# Altium PCB PCB1.PcbDoc
Units mm, origin at the board's own origin, x right, y up, seen from the top; angles counter-clockwise.
Board outline 100 x 50 mm, 2 copper layers (Top Layer, Bottom Layer); 21 components, 15 nets, 63 pads, 0 vias.
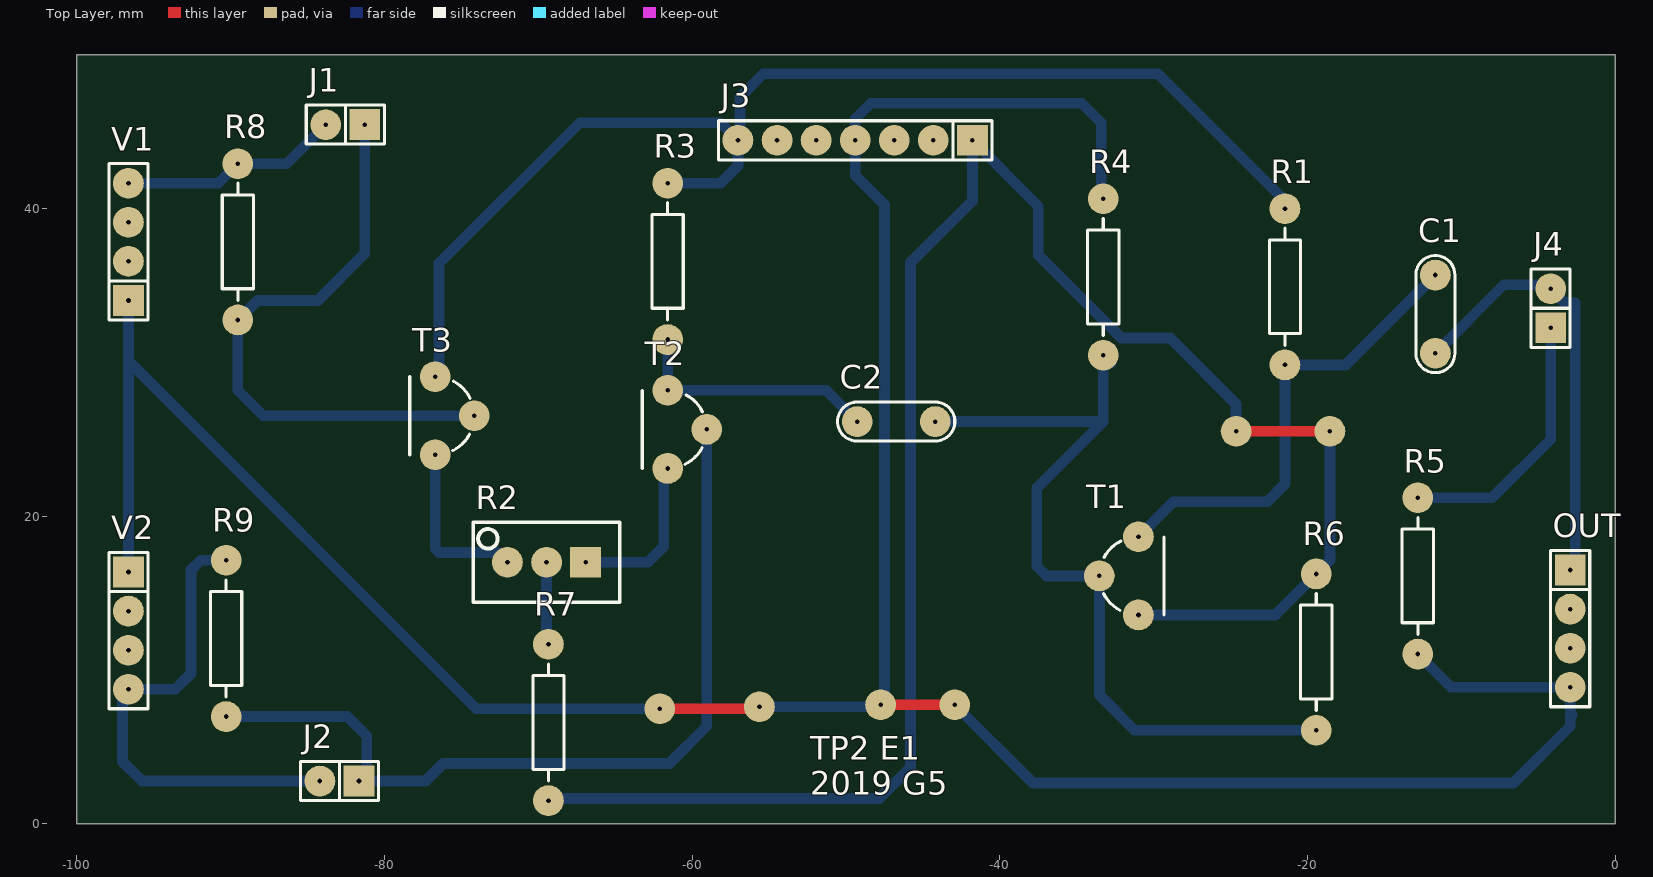
[diagram p0: Top Layer view]
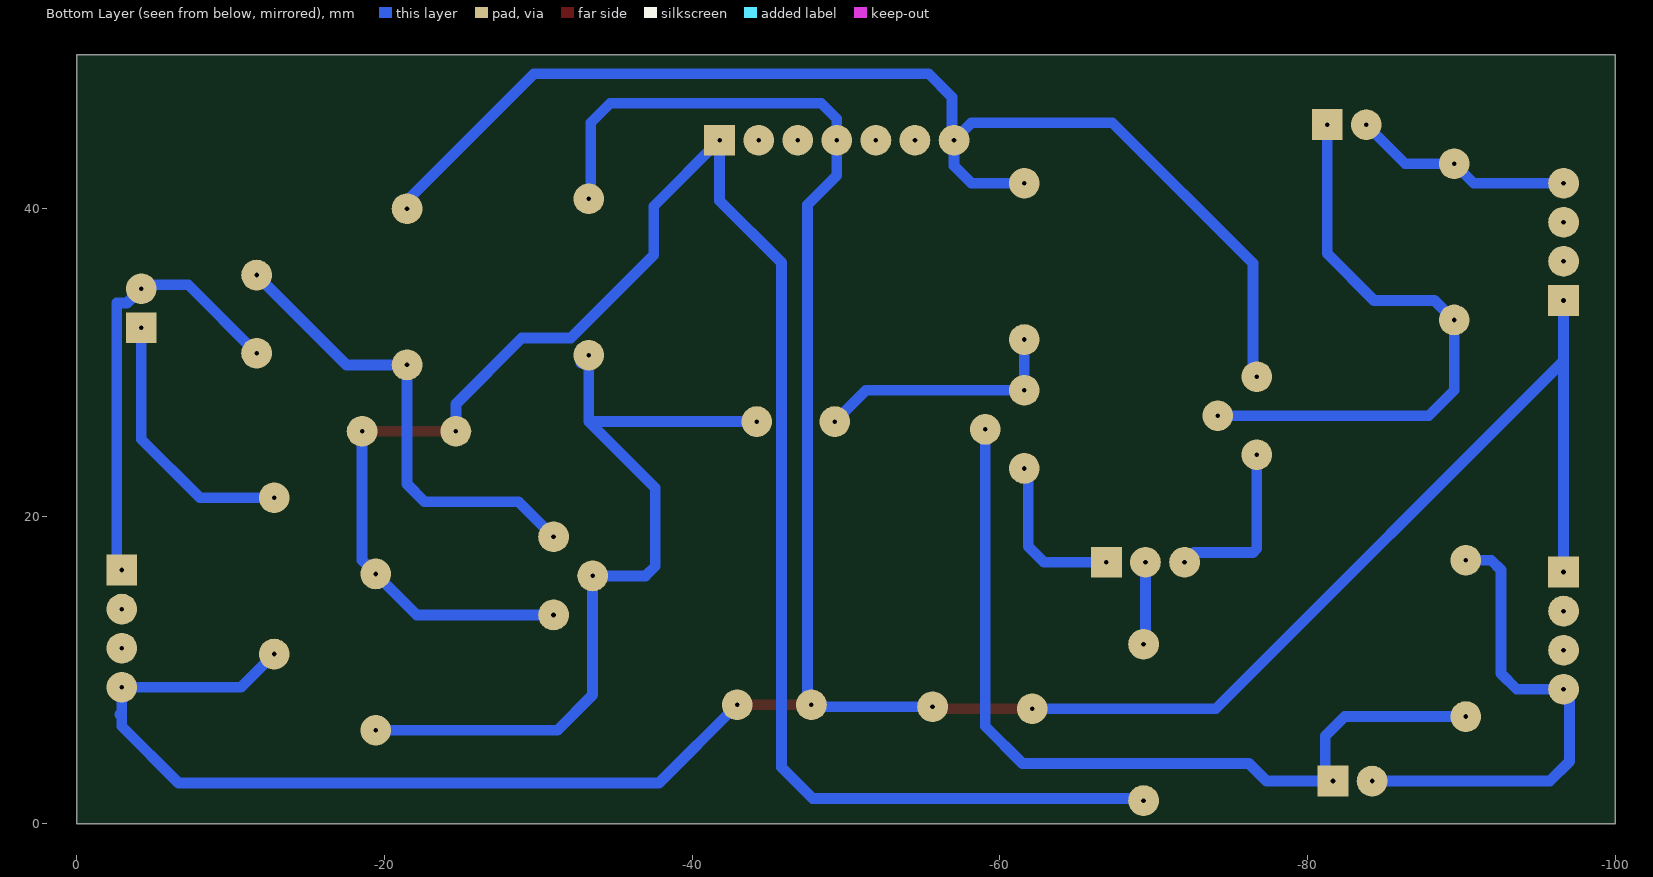
[diagram p1: Bottom Layer view, seen from below]
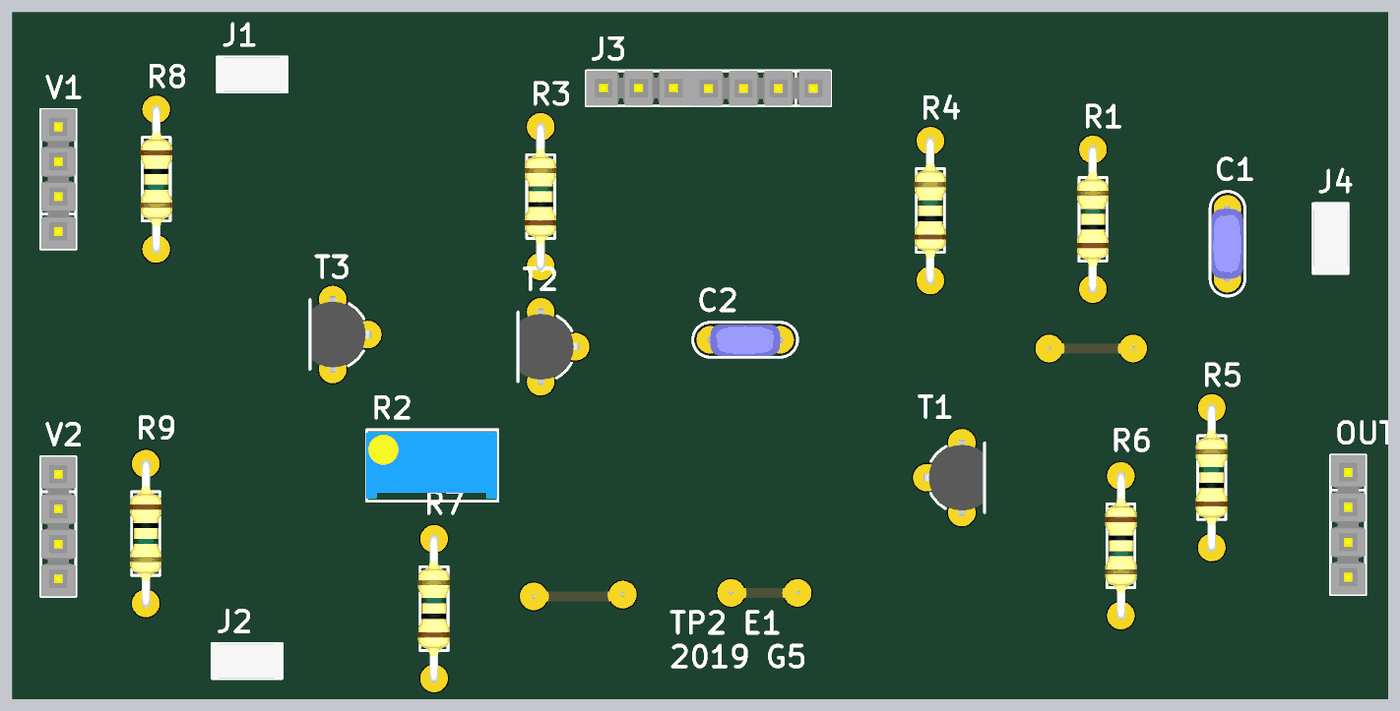
[diagram p2: 3D render of the assembled board from above, using the file's embedded part models]

## Layer stack, top to bottom
Top Solder: solder mask 0.0102, Solder Resist, Dk 3.5
Top Layer: signal copper 0.0356
Dielectric 1: dielectric 0.32, FR-4, Dk 4.8
Bottom Layer: signal copper 0.0356
Bottom Solder: solder mask 0.0102, Solder Resist, Dk 3.5

## Board outline
0,0 -100,0 -100,50 0,50

## Design rules (kind name [scope] priority, off if disabled: settings)
Clearance [All] p1: gap=0.254 ignorepadtopadclearanceinfootprint=FALSE
PolygonConnect [All] p1: connectstyle=Relief reliefconductorwidth=0.254 reliefentries=4 polygonreliefangle="90 Angle" airgapwidth=0.254
RoutingVias [All] p1: holewidth=0.4 width=2 viastyle="Through Hole" minholewidth=0.3 minwidth=1.5 maxholewidth=0.5 maxwidth=2
SolderMaskExpansion [All] p1: expansion=0.102
Width [All] p1: maxlimit=0.9 minlimit=0.6 preferedwidth=0.7
30 further rules are at their usual default settings.

## Components (designator, comment, footprint, x,y, rotation, side; value= is the part's Value field where it differs from the comment)
C1 "100n" CAP200 -11.684,33.147 r270 top
C2 "100n" CAP200 -46.736,26.162 r0 top
J1 "JUMPER" JUMPER2 -82.55,45.466 r180 top
J2 "JUMPER" JUMPER2 -82.931,2.794 r180 top
J3 "CON7" SIP7 -41.783,44.45 r180 top
J4 "JUMPER" JUMPER2 -4.191,33.528 r90 top
OUT "CON4" SIP4 -2.921,12.7 r270 top
R1 "2.2k" RES400 -21.463,29.845 r90 top
R2 "PRESET" "PRESET V" -69.469,17.018 r180 top
R3 "6.8k" RES400 -61.595,31.496 r90 top
R4 "680" RES400 -33.274,30.48 r90 top
R5 "2.2k" RES400 -12.827,11.049 r90 top
R6 "6.8k" RES400 -19.431,16.256 r270 top
R7 "6.8k" RES400 -69.342,1.524 r90 top
R8 "570" RES400 -89.535,42.926 r270 top
R9 "570" RES400 -90.297,17.145 r270 top
T1 "PNP" TO92 -32.258,16.129 r270 top
T2 "NPN" TO92 -60.325,25.654 r90 top
T3 "NPN" TO92 -75.438,26.543 r90 top
V1 "CON4" SIP4 -96.647,37.846 r90 top
V2 "CON4" SIP4 -96.647,12.573 r270 top

## Footprints (in the part's own frame and the unit in brackets; to place one, negate y for a bottom-side part, rotate by r counter-clockwise, add the part's x,y. Pads: shape width x height; smd on the part's side, far side on the other; paste and mask are expansions set on the pad)
CAP200 [mm]
  round 2 hole 0.3: 1(-2.54,0) 2(2.54,0)
  silkscreen extent -3.81,-1.27 3.81,1.27, body extent -2.79,-1.17 2.79,1.12, height 6.24
JUMPER2 [mm]
  rect 2x2 hole 0.3: 1(-1.27,0)
  round 2 hole 0.3: 2(1.27,0)
  silkscreen extent -2.54,-1.27 2.54,1.27, body extent -2.46,-1.27 2.54,1.27, height 9.5
"PRESET V" [mm]
  rect 2x2 hole 0.3: 1(-2.54,0)
  round 2 hole 0.3: 2(0,0) 3(2.54,0)
  silkscreen extent -4.76,-2.6 4.76,2.6, body extent -4.7,-2.42 4.83,2.42, height 11.55
RES400 [mm]
  round 2 hole 0.3: 1(0,0) 2(10.16,0)
  silkscreen extent 1.27,-1.02 8.89,1.02, body extent -0.3,-1.14 10.46,1.17, height 2.43
SIP4 [mm]
  rect 2x2 hole 0.3: 1(-3.81,0)
  round 2 hole 0.3: 2(-1.27,0) 3(1.27,0) 4(3.81,0)
  silkscreen extent -5.08,-1.27 5.08,1.27, body extent -5.08,-1.27 5.08,1.27, height 8.38
SIP7 [mm]
  rect 2x2 hole 0.3: 1(0,0)
  round 2 hole 0.3: 2(2.54,0) 3(5.08,0) 4(7.62,0) 5(10.16,0) 6(12.7,0) 7(15.24,0)
  silkscreen extent -1.27,-1.27 16.51,1.27, body extent -1.27,-1.3 16.51,1.27, height 8.38
TO92 [mm]
  round 2 hole 0.3: 1(0,-1.27) 2(2.54,1.27) 3(-2.54,1.27)
  silkscreen extent -2.54,-1 2.54,2.92, body extent -2.79,-1.55 2.79,2.79, height 8

## Part data
C1 C2: library part CAP
R1 R3 R4 R5 R6 R7 R8 R9: library part RES
T1: library part "TRANSISTOR PNP"
T2 T3: library part "TRANSISTOR NPN"

## Free pads (board coordinates)
  round 2 hole 0.3: 2(-62.103,7.493) 3(-55.626,7.62) 10(-24.638,25.527) 11(-18.542,25.527) 12(-47.752,7.747) 13(-42.926,7.747)

## Nets (pads, with @x,y where several pads share a name; then routed paths per layer and width w, separated by ;. In a path a pad name is that pad's centre, name@x,y a point inside that pad or via, vN(x,y) a via of type N, cw(c..) or ccw(c..) an arc to the next point about the centre after c; other vN are vias at no path point)
GND: J3.4 OUT.4 pad.2 pad.3 pad.12 pad.13 R4.2 R5.1 V1.1 V2.1 | length 198.5
  Top Layer w0.7: pad.2 -55.88,7.493 pad.3@-55.753,7.62 ; pad.12 pad.13@-43.053,7.747
  Bottom Layer w0.7: V2.1 -96.647,30.099 ; V1.1 -96.647,30.099 ; pad.2@-62.484,7.493 -74.041,7.493 -96.647,30.099 ; pad.3 -47.498,7.62 -47.498,40.259 -49.403,42.164 J3.4 -49.403,45.847 -48.387,46.863 -34.671,46.863 -33.401,45.593 -33.401,40.767 R4.2 ; pad.13 -37.846,2.667 -6.604,2.667 -2.921,6.35 -2.921,6.985 -2.794,7.112 -2.921,7.239 OUT.4 -10.668,8.89 R5.1
NetC1_1: C1.1 R1.1 T1.3 | length 30.9
  Bottom Layer w0.7: T1.3 -28.702,20.955 -22.606,20.955 -21.463,22.098 R1.1 -17.526,29.845 C1.1
NetC1_2: C1.2 J4.2 OUT.1 | length 28.9
  Bottom Layer w0.7: C1.2 -7.239,35.052 -4.445,35.052 J4.2 -3.255,33.862 -2.587,33.862 -2.587,16.844 OUT.1
NetC2_1: C2.1 R3.1 T2.2 | length 16.5
  Bottom Layer w0.7: R3.1 T2.2 -51.308,28.194 C2.1
NetC2_2: C2.2 R4.1 R6.2 T1.1 | length 54.9
  Bottom Layer w0.7: C2.2@-44.831,26.162 C2.2 -33.274,26.162 ; R4.1@-32.766,29.972 R4.1 -33.274,26.162 ; R6.2 -31.242,6.096 -33.528,8.382 T1.1 -36.957,16.129 -37.592,16.764 -37.592,21.844 -33.274,26.162
NetJ1_2: J1.2 R8.1 V1.4 | length 14.4
  Bottom Layer w0.7: V1.4 -90.805,41.656 R8.1 -86.36,42.926 J1.2
NetJ2_2: J2.2 R9.1 V2.4 | length 32
  Bottom Layer w0.7: R9.1 -91.948,17.145 -92.583,16.51 -92.583,9.779 -93.599,8.763 V2.4 -97.028,8.382 -97.028,4.064 -95.758,2.794 J2.2
NetJ4_1: J4.1 R5.2 | length 17.5
  Bottom Layer w0.7: R5.2 -8.001,21.209 -4.191,25.019 J4.1
NetR2_1: R2.1 T2.3 | length 10.7
  Bottom Layer w0.7: R2.1 -62.865,17.018 -61.849,18.034 -61.849,22.86 T2.3
NetR2_2: R2.2 R7.2 | length 5.4
  Bottom Layer w0.7: R2.2 -69.469,11.811 R7.2
NetR2_3: R2.3 T3.3 | length 11.2
  Bottom Layer w0.7: T3.3 -76.708,17.907 -76.454,17.653 -72.644,17.653 R2.3
V1: J1.1 R8.2 T3.1 | length 39
  Bottom Layer w0.7: J1.1 -81.28,37.084 -84.328,34.036 -88.265,34.036 R8.2 -89.535,28.194 -87.884,26.543 T3.1
V2: J2.1 R9.2 T2.1 | length 56.2
  Bottom Layer w0.7: R9.2 -82.423,6.985 -81.153,5.715 -81.153,3.302 J2.1 -77.343,2.794 -76.2,3.937 -61.468,3.937 -59.055,6.35 T2.1
VCC: J3.7 R1.2 R3.2 T3.2 | length 80.9
  Bottom Layer w0.7: T3.2 -76.454,29.337 -76.454,36.449 -67.31,45.593 -58.166,45.593 J3.7 ; R3.2 -58.166,41.656 -57.023,42.799 J3.7 ; R1.2 -21.209,40.259 -29.718,48.768 -55.372,48.768 -56.896,47.244 -56.896,44.577 J3.7
VEE: J3.1 pad.10 pad.11 R6.1 R7.1 T1.2 | length 122.8
  Top Layer w0.7: pad.10 pad.11 pad.11@-18.415,25.654
  Bottom Layer w0.7: R7.1 -69.215,1.651 -47.832,1.651 -45.8,3.683 -45.8,36.496 -41.783,40.513 J3.1 -37.497,40.164 -37.497,36.989 -32.099,31.591 -28.924,31.591 -24.638,27.305 pad.10@-24.638,26.035 ; T1.2 -22.098,13.589 R6.1 -18.542,17.145 pad.11
pads on no net: J3.2 J3.3 J3.5 J3.6 OUT.2 OUT.3 V1.2 V1.3 V2.2 V2.3

## Silkscreen, mask and mechanical layers (free items; w line width, h text height)
Top Overlay:
  text "TP2 E1 / 2019 G5" at -52.324,1.905 h1.52